# EAGLE board Arduino Breakout Shield 2 (EAGLE 6.2)
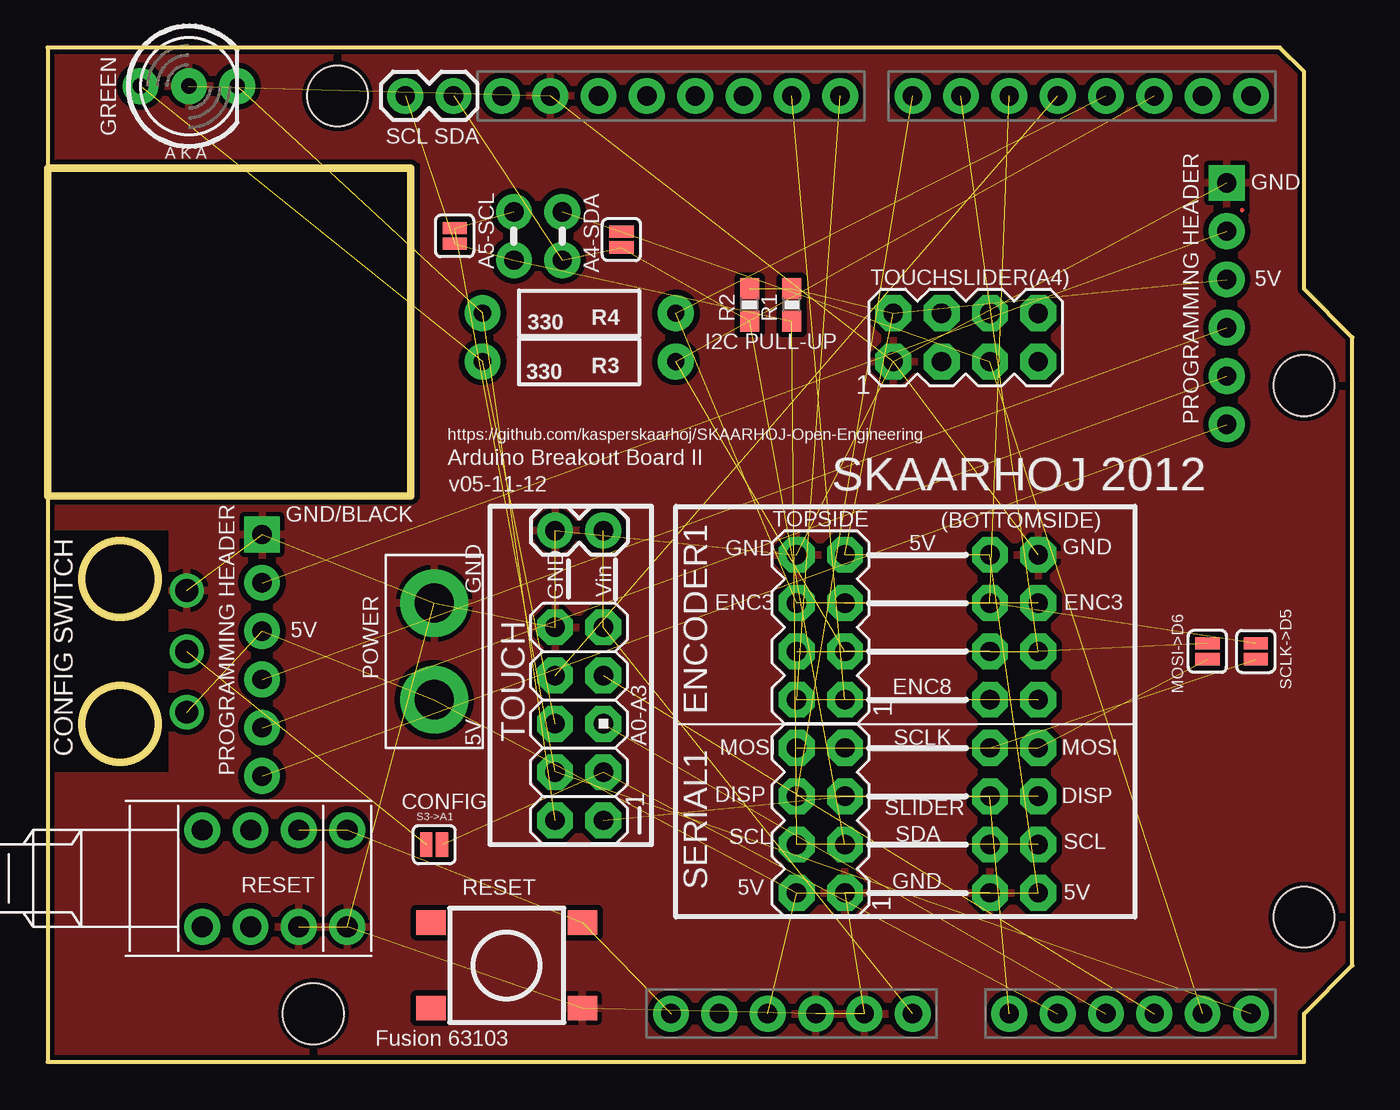
[diagram p0: board, top side]
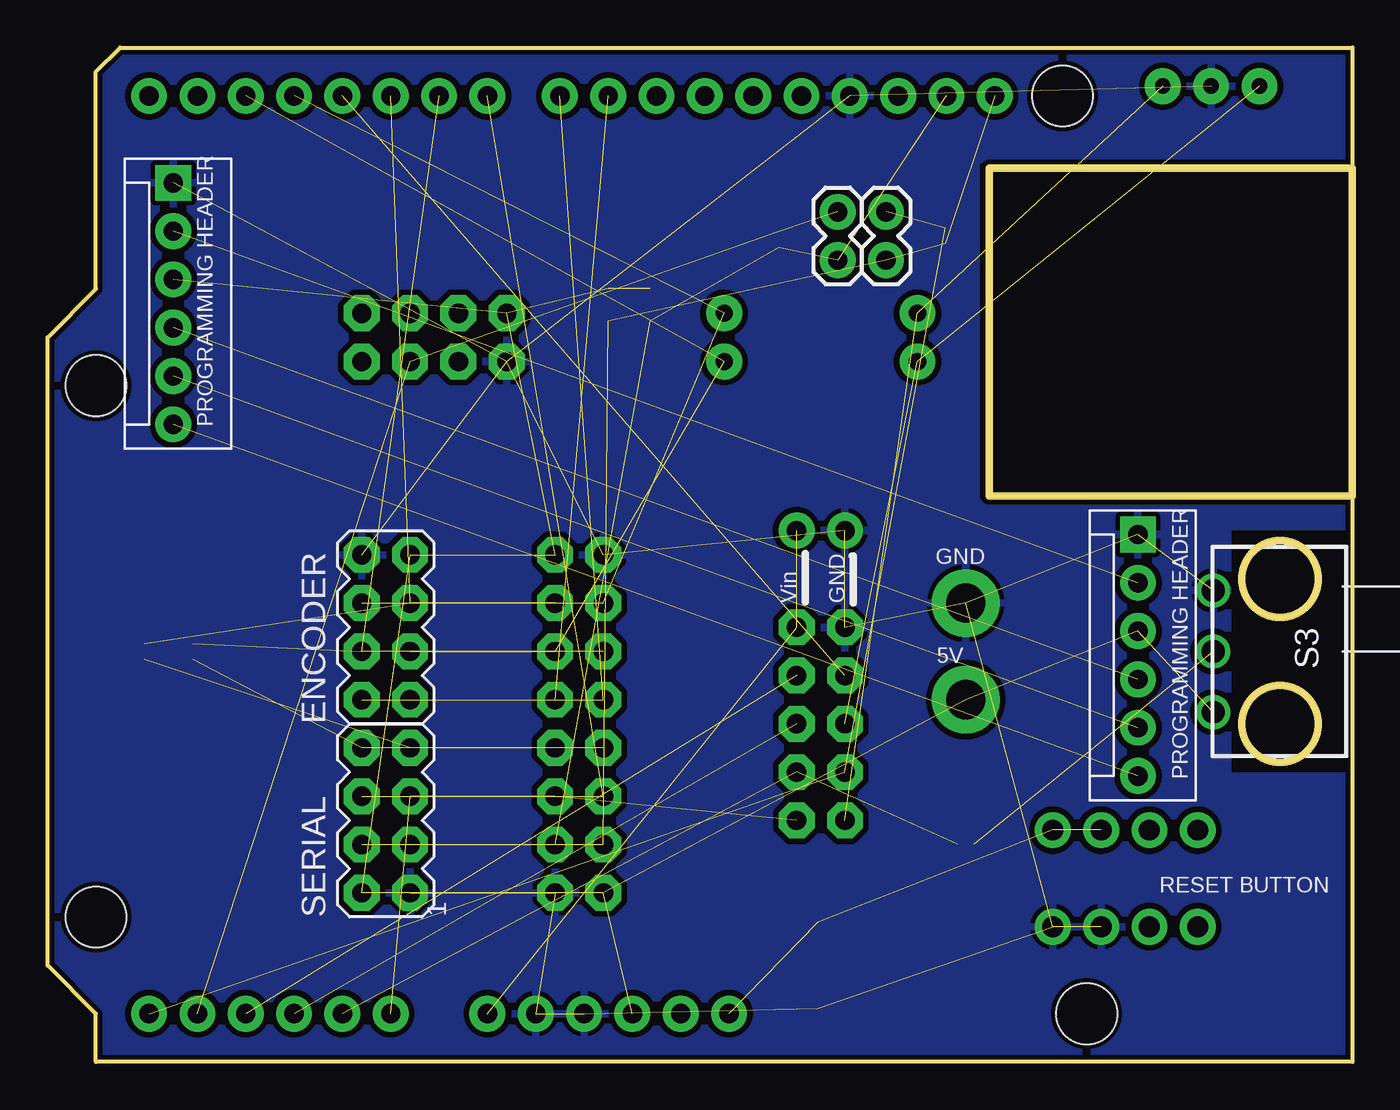
[diagram p1: board, bottom side, seen from below]

Size 68.58 x 53.34 mm. Coordinates in mm from the lower left corner, seen from the top.
Outline: 0,29.77 19.1,29.77 19.1,46.99 0,46.99 0,29.77
Outline: 0,0 0,29.77
Copper layers (1*16): Top 0.035mm / dielectric 1.5mm / Bottom 0.035mm
Design rules: minimum track width 6mil, minimum drill 12mil, track to track 6mil, track to pad 6mil, pad to pad 6mil, via to via 6mil, smd to smd 0mil, copper to edge 10mil, drill to drill 10mil, minimum pad ring 10mil, minimum via ring 6mil, stop-mask expansion 2mil, vias tented up to drill 100mil, thermal gap 10mil
Net classes: 0 default: width 0.203 mm, drill 0.61 mm, clearance 0.203 mm; 1 Power: width 0.406 mm, drill 0.61 mm, clearance 0.305 mm
Holes 3.2 mm at 13.97,2.54
tRestrict: area 0,29.6 to 19.6,47.2; area 0,15.2 to 6.3,27.9
bRestrict: area 0,29.6 to 19.6,47.2; area 0,15.2 to 6.3,27.9
Milling: area 1.8,23.4 to 5.8,27.4; area 1.8,15.8 to 5.8,19.8

## Footprints (pad centres in the part's own frame; a part is rotated, then mirrored left to right if it is on the bottom)
2X4 = drill 1.016 pad 1.88 octagon: 1 -3.81,-1.27; 2 -3.81,1.27; 3 -1.27,-1.27; 4 -1.27,1.27; 5 1.27,-1.27; 6 1.27,1.27; 7 3.81,-1.27; 8 3.81,1.27
MOLEX-1X6 = drill 1.016 pad 1.88 square: 1 0,0 | drill 1.016 pad 1.88: 2 2.54,0; 3 5.08,0; 4 7.62,0; 5 10.16,0; 6 12.7,0
1X02 = drill 1.016 pad 1.88: 1 0,0; 2 2.54,0
AVR_ICSP = drill 1.016 pad 1.88 octagon: 1 -1.27,5.08; 2 1.27,5.08; 3 -1.27,2.54; 4 1.27,2.54; 5 -1.27,0; 6 1.27,0; 7 -1.27,-2.54; 8 1.27,-2.54; 9 -1.27,-5.08; 10 1.27,-5.08
1X02_XTRA_BIG = drill 2.057 pad 3.556: 1 -2.54,0; 2 2.54,0
SJ_2S = smd 0.635 x 1.27: 1 -0.412,0; 2 0.412,0
0603-RES = smd 1.1 x 1: 1 -0.85,0; 2 0.85,0
AXIAL-0.4 = drill 0.9 pad 1.88: P$1 -5.08,0; P$2 5.08,0
PUSHBUTTON = drill 1.1 pad 1.88: 1 2.54,2.54; 2 2.54,-2.54; 3 -2.54,2.54; 4 -2.54,-2.54
TECONNECTIVITY-DPST = drill 1.2: P$1 3,3.2; P$2 3,0; P$3 3,-3.2
TACTILE_SWITCH_TALL = smd 1.55 x 1.3: A1 -3.975,-2.25; A2 3.975,-2.25; B1 -3.975,2.25; B2 3.975,2.25
DUEMILANOVE_VIAS = drill 1.016 pad 1.88: 3.3V 50.8,13.97; 5V 50.8,16.51; A0 50.8,29.21; A1 50.8,31.75; A2 50.8,34.29; A3 50.8,36.83; A4 50.8,39.37; A5 50.8,41.91; AREF 2.54,2.54; D2 2.54,36.83; D3 2.54,34.29; D4 2.54,31.75; D5 2.54,29.21; D6 2.54,26.67; D7 2.54,24.13; D8 2.54,20.32; D9 2.54,17.78; D10 2.54,15.24; D11 2.54,12.7; D12 2.54,10.16; D13 2.54,7.62; GND@0 50.8,19.05; GND@1 50.8,21.59; GND@2 2.54,5.08; RES 50.8,11.43; RX 2.54,41.91; TX 2.54,39.37; VIN 50.8,24.13
LED5MM-BICOLOR = drill 0.813 pad 1.88: A2 2.54,0; A3 -2.54,0; K1 0,0
ARDUINO-OUTLINE = hole 3.2: 15.24,50.8; 66.04,35.56; 66.04,7.62

## Placement (x,y rotation side)
ENCODER  M04X2  [2X4]  50.8,22.86 90 bottom
ENCODER1  M04X2  [2X4]  40.64,22.86 90 top
JP1  [MOLEX-1X6]  61.98,46.23 270 bottom
JP2  [MOLEX-1X6]  11.27,27.74 270 bottom
JP3  [1X02]  21.34,50.8 180 top
JP4  [1X02]  26.67,27.94 0 top
JP5  [1X02]  24.51,42.16 90 bottom
JP6  [1X02]  27.05,42.16 90 bottom
JP7  M05X2PTH  [AVR_ICSP]  27.94,17.78 180 top
JP8  [1X02_XTRA_BIG]  20.32,21.59 270 top
MOSI->D6  SOLDERJUMPERNC  [SJ_2S]  60.96,21.59 90 top
R1  1K5  [0603-RES]  39.12,39.81 90 top
R2  1K5  [0603-RES]  36.89,39.81 90 top
R3  330  [AXIAL-0.4]  27.94,36.83 0 top
R4  330  [AXIAL-0.4]  27.94,39.37 0 top
S1  [PUSHBUTTON]  13.21,9.65 270 top
S2  [PUSHBUTTON]  10.67,9.65 270 top
S3  SWITCH-DPST  [TECONNECTIVITY-DPST]  4.32,21.59 180 bottom
S3->A1  SOLDERJUMPERNC  [SJ_2S]  20.32,11.43 0 top
S3->A2  SOLDERJUMPERNC  [SJ_2S]  21.4,43.43 90 top
S3->A3  SOLDERJUMPERNC  [SJ_2S]  30.16,43.24 90 top
S4  SWITCH-MOMENTARY-2  [TACTILE_SWITCH_TALL]  24.13,5.08 0 top
SCLK->D5  SOLDERJUMPERNC  [SJ_2S]  63.5,21.59 270 top
SERIAL  M04X2  [2X4]  50.8,12.7 90 bottom
SERIAL1  M04X2  [2X4]  40.64,12.7 90 top
TOUCHSLIDER(A4)  M04X2  [2X4]  48.26,38.1 0 top
U1  ARDUINO_SHIELDNO_SILK  [DUEMILANOVE_VIAS]  21.34,53.34 270 top
U$7  LEDBICOLOR-AKA  [LED5MM-BICOLOR]  7.43,51.31 0 top
U$8  [ARDUINO-OUTLINE]  0,0 0 top

## Library data of the parts
ENCODER ENCODER1 JP1-JP8 MOSI->D6 R1-R4 S3->A1-S3->A3 S4 SCLK->D5 SERIAL SERIAL1 TOUCHSLIDER(A4) U1 U$8 = SparkFun
S1-S3 U$7 = SKAARHOJ

## Nets
5V [Power]: ENCODER1.7 ENCODER.7 JP1.3 JP2.3 JP8.2 R1.2 R2.2 S3.P$1 SERIAL1.2 SERIAL.2 TOUCHSLIDER(A4).2 U1.5V
A0: JP7.1 SERIAL1.5 SERIAL.5 U1.A0
A1: JP7.3 S3->A1.2 U1.A1
A2: JP7.5 U1.A2
A3: JP7.7 U1.A3
A4: JP6.2 S3->A3.2 TOUCHSLIDER(A4).5 U1.A4
A5: JP5.2 JP7.4 S3->A2.2 U1.A5
D2: ENCODER1.3 ENCODER.3 R3.P$2 U1.D2
D3: ENCODER1.6 ENCODER.6 R4.P$2 U1.D3
D4: JP7.8 U1.D4
D5: ENCODER1.5 ENCODER.5 SCLK->D5.1 U1.D5
D6: ENCODER1.4 ENCODER.4 MOSI->D6.2 U1.D6
D7: SERIAL1.6 SERIAL.6 U1.D7
D8: ENCODER1.2 ENCODER.2 U1.D8
D9: ENCODER1.1 ENCODER.1 U1.D9
GND [Power]: ENCODER1.8 ENCODER.8 JP1.1 JP2.1 JP4.1 JP7.10 JP8.1 S1.1 S2.1 S3.P$3 S4.A2 SERIAL1.1 SERIAL.1 TOUCHSLIDER(A4).1 U1.GND@0 U1.GND@1 U1.GND@2 U$7.K1
I2C_SCL: JP3.2 JP5.1 R1.1 S3->A2.1 SERIAL1.4 SERIAL.4
I2C_SDA: JP3.1 JP6.1 R2.1 S3->A3.1 SERIAL1.3 SERIAL.3
MOSI: MOSI->D6.1 SERIAL1.8 SERIAL.8
N$1: JP1.2 JP2.2
N$2: S3->A1.1 S3.P$2
N$7: JP7.2 R4.P$1 U$7.A2
N$8: JP7.6 R3.P$1 U$7.A3
N$33: JP1.4 JP2.4
N$34: JP1.5 JP2.5
N$45: JP1.6 JP2.6
RESET: S1.3 S2.3 S4.B2 U1.RES
SCLK: SCLK->D5.2 SERIAL1.7 SERIAL.7
VIN [Power]: JP4.2 JP7.9 U1.VIN

## Tracks (layer width: path | path; a pad name or v marks a point on that pad's centre or on a via)
5V  (11 unrouted)
A0  (3 unrouted)
A1  (2 unrouted)
A2  (1 unrouted)
A3  (1 unrouted)
A4  (3 unrouted)
A5  (3 unrouted)
D2  (3 unrouted)
D3  (3 unrouted)
D4  (1 unrouted)
D5  (3 unrouted)
D6  (3 unrouted)
D7  (2 unrouted)
D8  (2 unrouted)
D9  (2 unrouted)
GND  (17 unrouted)
  pour Top: 0,0 68.58,0 68.58,53.34 0,53.34
  pour Bottom: 0,0 68.58,0 68.58,53.34 0,53.34
I2C_SCL  (5 unrouted)
I2C_SDA  (5 unrouted)
MOSI  (2 unrouted)
N$1  (1 unrouted)
N$2  (1 unrouted)
N$5
  Top 0.203: 62.79,44.81 62.79,44.78
N$7  (2 unrouted)
N$8  (2 unrouted)
N$33  (1 unrouted)
N$34  (1 unrouted)
N$45  (1 unrouted)
RESET  (3 unrouted)
SCLK  (2 unrouted)
VIN  (2 unrouted)

## Text on the board
_tsilk: GREEN | SCL | SDA | A5-SCL | A4-SDA | GND | 5V | I2C PULL-UP | 1 | PROGRAMMING HEADER | https://github.com/kasperskaarhoj/SKAARHOJ-Open-Engineering | Arduino Breakout Board II | v05-11-12 | SKAARHOJ 2012 | GND/BLACK | TOPSIDE | 5V | (BOTTOMSIDE) | GND | GND | GND | GND | Vin | ENC3 | ENC3 | 5V | POWER | ENC8 | 1 | 5V | TOUCH | A0-A3 | SCLK | CONFIG SWITCH | MOSI | MOSI | PROGRAMMING HEADER | DISP | SLIDER | DISP | CONFIG | 1 | SDA | SCL | SCL | GND | RESET | RESET | 5V | 5V | 1 | Fusion 63103
_bsilk: PROGRAMMING HEADER | GND | GND | Vin | 5V | PROGRAMMING HEADER | RESET BUTTON | 1